# Altium PCB PCB_Buttons_Luximetro.PcbDoc
Units mm, origin at the board's own origin, x right, y up, seen from the top; angles counter-clockwise.
Board outline 100.08 x 53.09 mm, 2 copper layers (Top Layer, Bottom Layer); 11 components, 11 nets, 34 pads, 0 vias.
Unrouted connection lines stored in the file: 1.
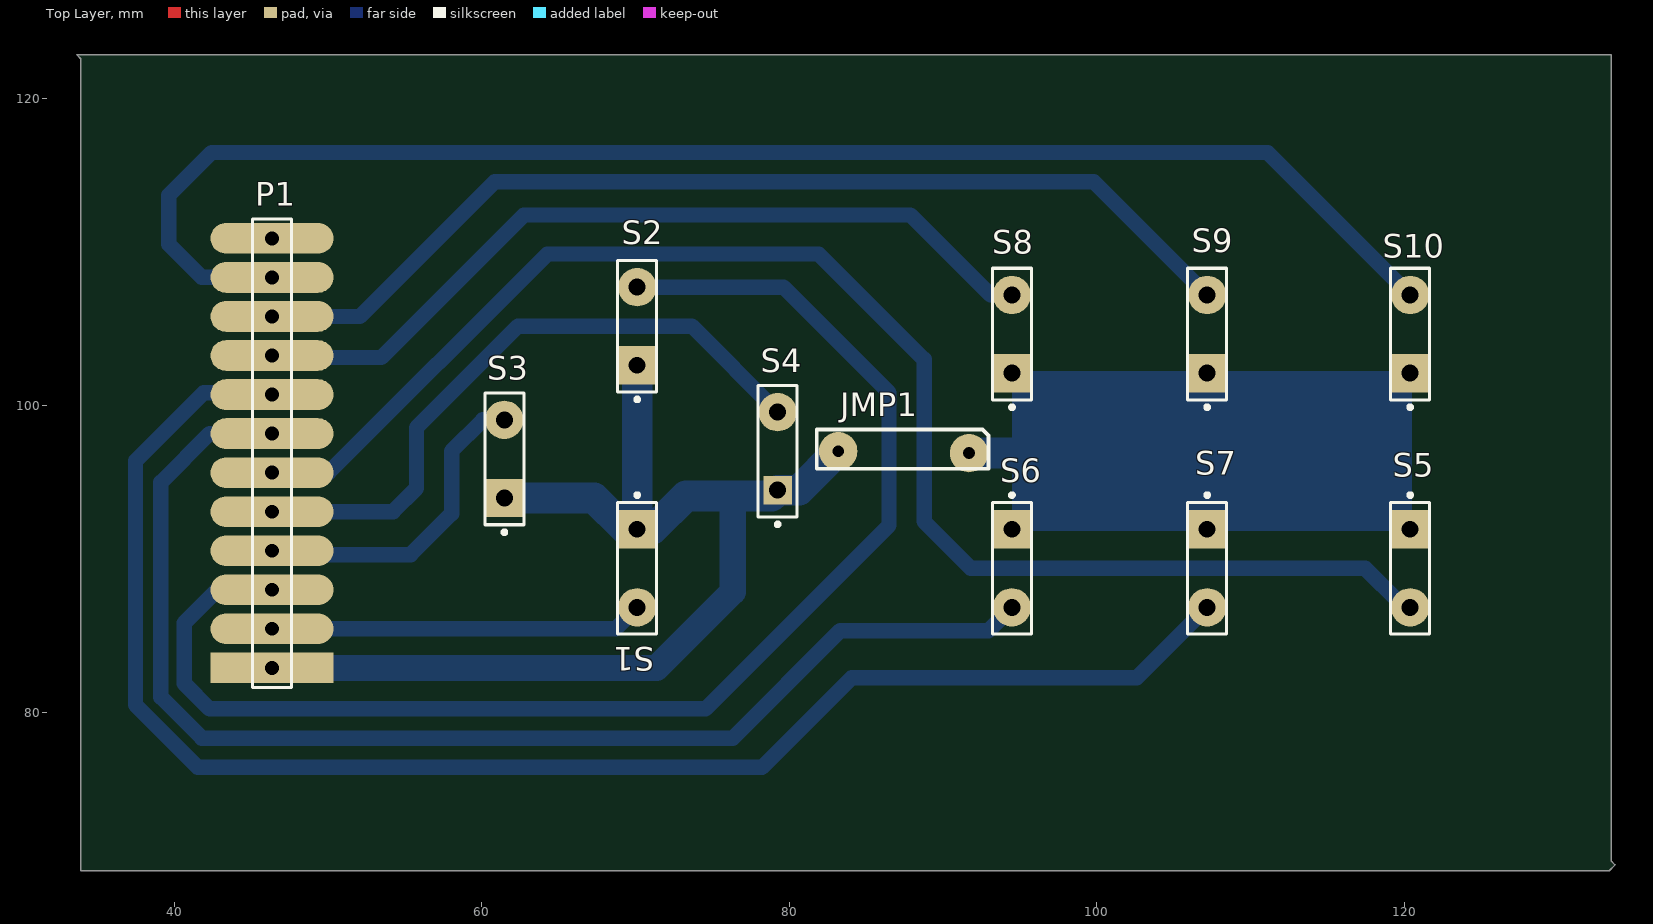
[diagram p0: Top Layer view]
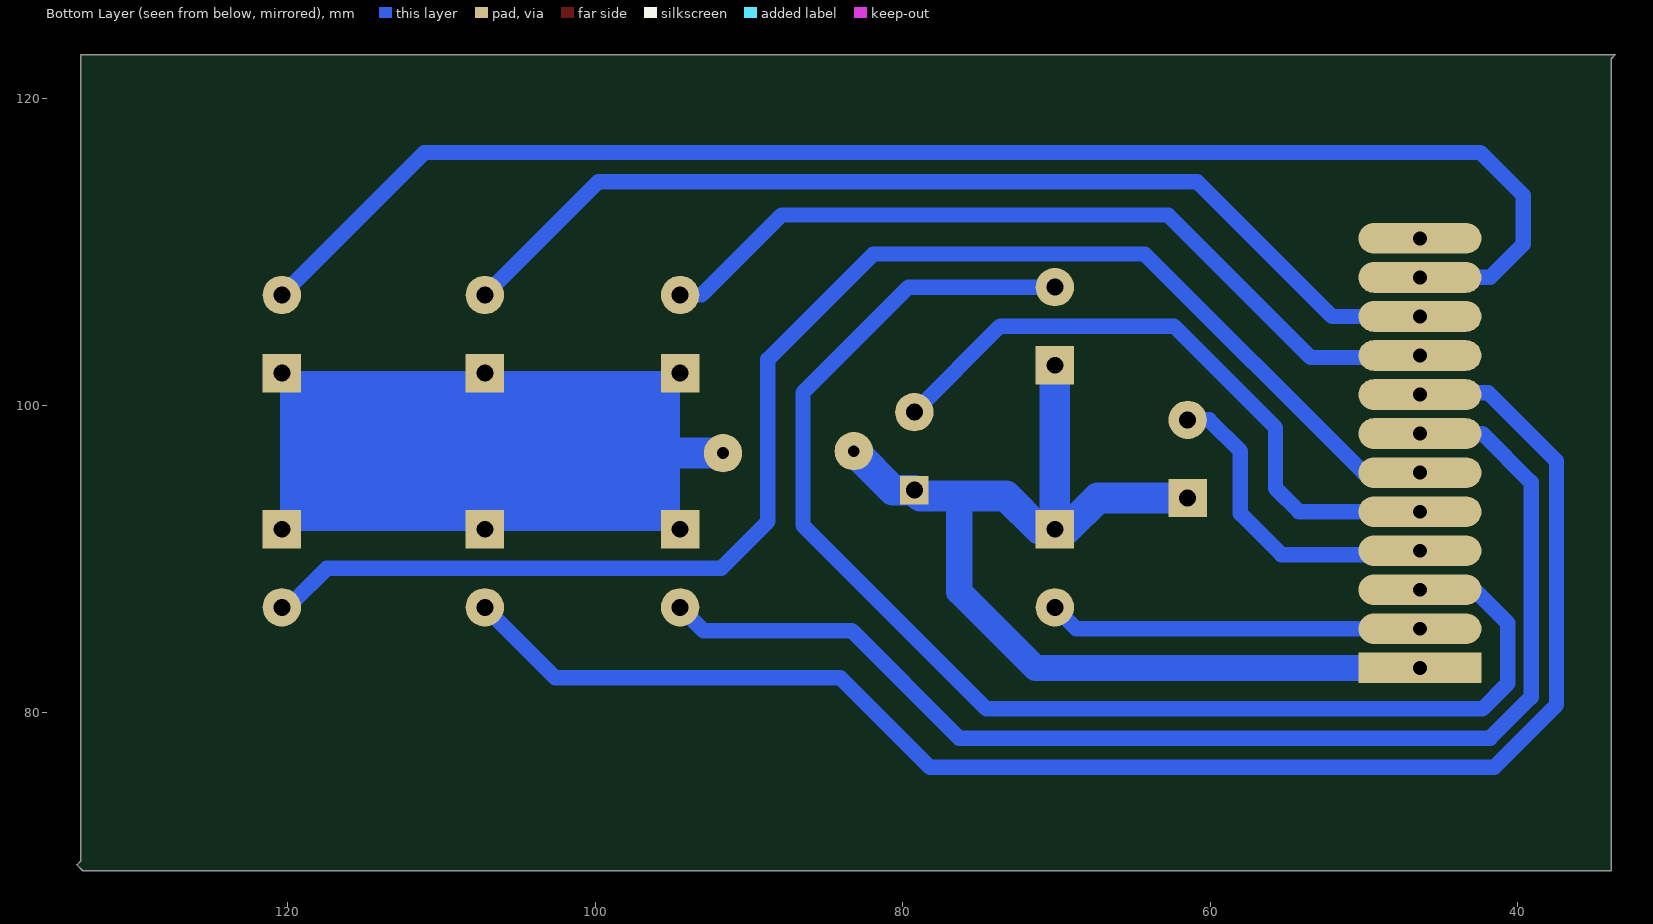
[diagram p1: Bottom Layer view, seen from below]

## Layer stack, top to bottom
Top Layer: signal copper 0.0356
Dielectric: dielectric 0.32, FR-4, Dk 4.8
Bottom Layer: signal copper 0.0356

## Board outline
33.655,122.809 33.909,122.555 33.909,69.723 133.35,69.723 133.731,70.104 133.477,70.358 133.477,122.809

## Design rules (kind name [scope] priority, off if disabled: settings)
Clearance [All] p1: gap=0.254
PolygonConnect [All] p1: connectstyle=Relief reliefconductorwidth=0.254 reliefentries=4 polygonreliefangle="90 Angle"
RoutingVias [All] p1: holewidth=0.711 width=1.27 viastyle="Through Hole" minholewidth=0.711 minwidth=1.27 maxholewidth=0.711 maxwidth=1.27
SolderMaskExpansion [All] p1: expansion=0.102
TestPointUsage [All] p1: valid=0 allowmultiple=FALSE
Testpoint [All] p1: side=15 testpointundercomponent=TRUE minsize=1.016 maxsize=2.54 preferedsize=1.524 minholesize=0 maxholesize=1.016 preferedholesize=0.813 testpointgrid=0.025 style=1023 order=0123456789
Width [All] p1: maxlimit=3 minlimit=0.254 preferedwidth=0.254
19 further rules are at their usual default settings.

## Components (designator, comment, footprint, x,y, rotation, side; value= is the part's Value field where it differs from the comment)
P1 "Conector - Painel Botoes" HDR1X12 46.355,82.931 r90 top
S1 "Down" SPST-2#1 70.104,89.408 r270 top
S2 "UP" SPST-2#1 70.104,105.156 r90 top
S3 "LEFT" SPST-2#1 61.468,96.52 r90 top
S4 "RIGHT" SPST-2#2 79.248,97.028 r90 top
S5 "APG SLV" SPST-2#1 120.396,89.408 r270 top
S6 "LST SLV" SPST-2#1 94.488,89.408 r270 top
S7 "AJST SLV" SPST-2#1 107.188,89.408 r270 top
S8 "AJST CLK" SPST-2#1 94.488,104.648 r90 top
S9 "RESET" SPST-2#1 107.188,104.648 r90 top
S10 "ON/OFF" SPST-2#1 120.396,104.648 r90 top

## Footprints (in the part's own frame and the unit in brackets; to place one, negate y for a bottom-side part, rotate by r counter-clockwise, add the part's x,y. Pads: shape width x height; smd on the part's side, far side on the other; paste and mask are expansions set on the pad)
HDR1X12 [mm] "Connector; Header; 12 Position"
  rect 2x8 hole 0.9: 1(0,0)
  oval 2x8 hole 0.9: 2(2.54,0) 3(5.08,0) 4(7.62,0) 5(10.16,0) 6(12.7,0) 7(15.24,0) 8(17.78,0) 9(20.32,0) 10(22.86,0) 11(25.4,0) 12(27.94,0)
  silkscreen extent -1.27,-1.27 29.21,1.27
SPST-2#1 [mm] "Circuit Breaker; 2 Leads"
  rect 2.5x2.5 hole 1.1: 1(-2.54,0)
  round 2.5 hole 1.1: 2(2.54,0)
  silkscreen extent -4.89,-1.27 4.28,1.27
SPST-2#2 [mm] "Circuit Breaker; 2 Leads"
  rect 1.85x1.85 hole 1.1: 1(-2.54,0)
  round 2.5 hole 1.1: 2(2.54,0)
  silkscreen extent -4.89,-1.27 4.28,1.27

## Part data
P1: library part "Header 12", "Header, 12-Pin"
S1 S2 S3 S4 S5 S6 S7 S8 S9 S10: library part SW-PB, "Switch"

## Free pads (board coordinates)
  round 2.5 hole 0.762: 1(83.185,97.028) 1(91.694,96.901)

## Nets (pads, with @x,y where several pads share a name; then routed paths per layer and width w, separated by ;. In a path a pad name is that pad's centre, name@x,y a point inside that pad or via, vN(x,y) a via of type N, cw(c..) or ccw(c..) an arc to the next point about the centre after c; other vN are vias at no path point)
GND: P1.1 pad.1 S1.1 S2.1 S3.1 S4.1 S5.1 S6.1 S7.1 S8.1 S9.1 S10.1 | length 140
  Bottom Layer w0.254: S1.1@69.342,91.948 S1.1 S1.1@71.12,91.948 ; S6.1 S5.1 S10.1 S9.1 S8.1
  Bottom Layer w1.7: P1.1 71.374,82.931 76.327,87.884 76.327,94.107
  Bottom Layer w2: S3.1 67.31,93.98 S1.1@69.342,91.948 ; S1.1 S2.1 ; S1.1@71.12,91.948 73.279,94.107 76.327,94.107 78.867,94.107 S4.1 80.645,94.488 pad.1@83.185,97.028 ; pad.1@91.694,96.901 96.139,96.901
NetP1_2: P1.2 S1.2 | length 24.3
  Bottom Layer w1: P1.2 68.707,85.471 S1.2
NetP1_3: P1.3 S2.2 | length 86.3
  Bottom Layer w1: P1.3@42.799,88.011 40.64,85.852 40.64,81.915 42.291,80.264 74.549,80.264 86.487,92.202 86.487,100.838 79.629,107.696 S2.2
NetP1_4: P1.4 S3.2 | length 21.4
  Bottom Layer w0.254: P1.4@46.482,90.043 46.355,90.043 P1.4@46.609,90.297
  Bottom Layer w1: P1.4@46.609,90.297 55.372,90.297 58.039,92.964 58.039,97.028 60.071,99.06 S3.2
NetP1_5: P1.5 S4.2 | length 42.5
  Bottom Layer w1: P1.5 54.229,93.091 55.753,94.615 55.753,98.552 62.357,105.156 73.66,105.156 S4.2
NetP1_6: P1.6 S5.2 | length 94.9
  Bottom Layer w0.254: P1.6 P1.6@50.038,95.631
  Bottom Layer w1: P1.6@50.038,95.631 64.262,109.855 81.915,109.855 88.773,102.997 88.773,92.456 91.821,89.408 117.475,89.408 S5.2@119.761,87.122
NetP1_7: P1.7 S6.2 | length 78.5
  Bottom Layer w1: 42.291,98.171 39.116,94.996 39.116,81.026 41.783,78.359 76.327,78.359 83.312,85.344 92.964,85.344 S6.2
NetP1_8: P1.8 S7.2 | length 102.4
  Bottom Layer w0.254: P1.8@46.228,100.838 P1.8
  Bottom Layer w1: P1.8@46.228,100.838 41.91,100.838 37.465,96.393 37.465,80.518 41.529,76.454 78.232,76.454 84.074,82.296 102.616,82.296 S7.2
NetP1_9: P1.9 S8.2 | length 54.2
  Bottom Layer w0.254: 53.34,103.251 53.467,103.124
  Bottom Layer w1: P1.9@46.482,103.124 53.467,103.124 62.738,112.395 87.884,112.395 93.091,107.188 S8.2
NetP1_10: P1.10 S9.2 | length 67.5
  Bottom Layer w1: P1.10 52.07,105.791 60.833,114.554 99.822,114.554 S9.2
NetP1_11: P1.11 S10.2 | length 96.7
  Bottom Layer w0.254: P1.11@46.482,108.458 P1.11@46.609,108.458
  Bottom Layer w1: P1.11 41.783,108.331 39.624,110.49 39.624,113.665 42.418,116.459 111.125,116.459 S10.2
pads on no net: P1.12

## Other copper
Bottom Layer:
  rectangle net GND: 94.488,91.948 120.396,102.108

## Silkscreen, mask and mechanical layers (free items; w line width, h text height)
Top Overlay:
  lines w0.254: 81.788,95.885 92.964,95.885 92.964,98.044 92.583,98.425 81.788,98.425 81.788,95.885
  text "JMP1" at 83.312,99.314 h1.52